# EAGLE board Stand Alone Wearable (EAGLE 5.11)
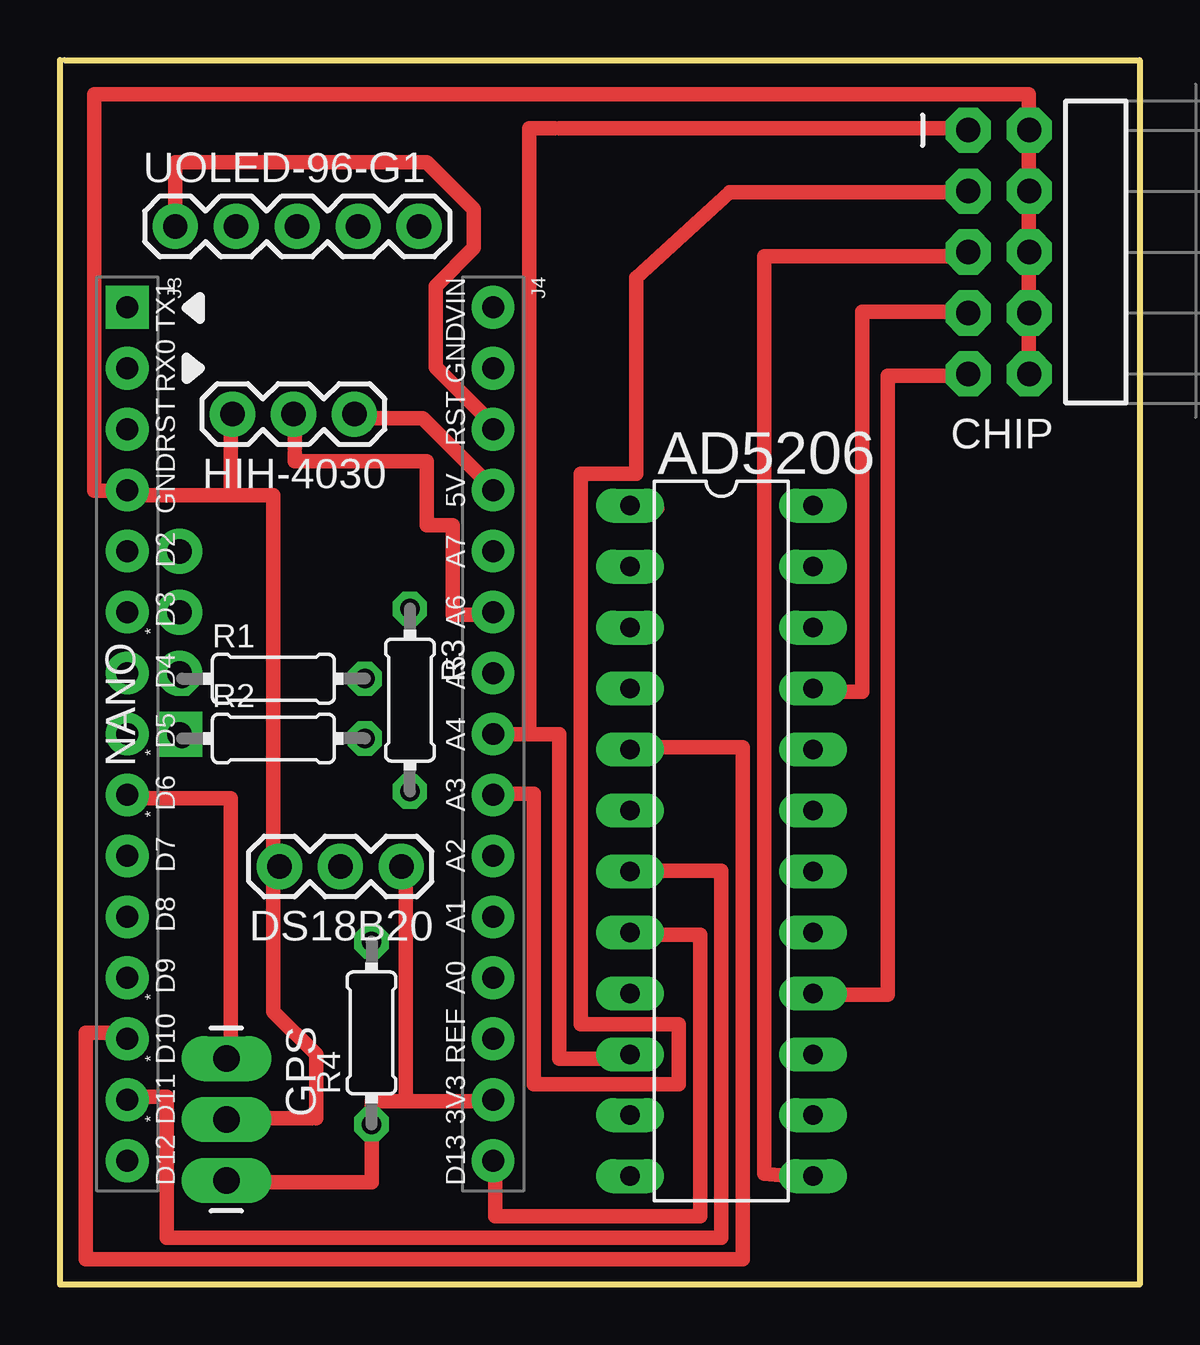
[diagram p0: board, top side]
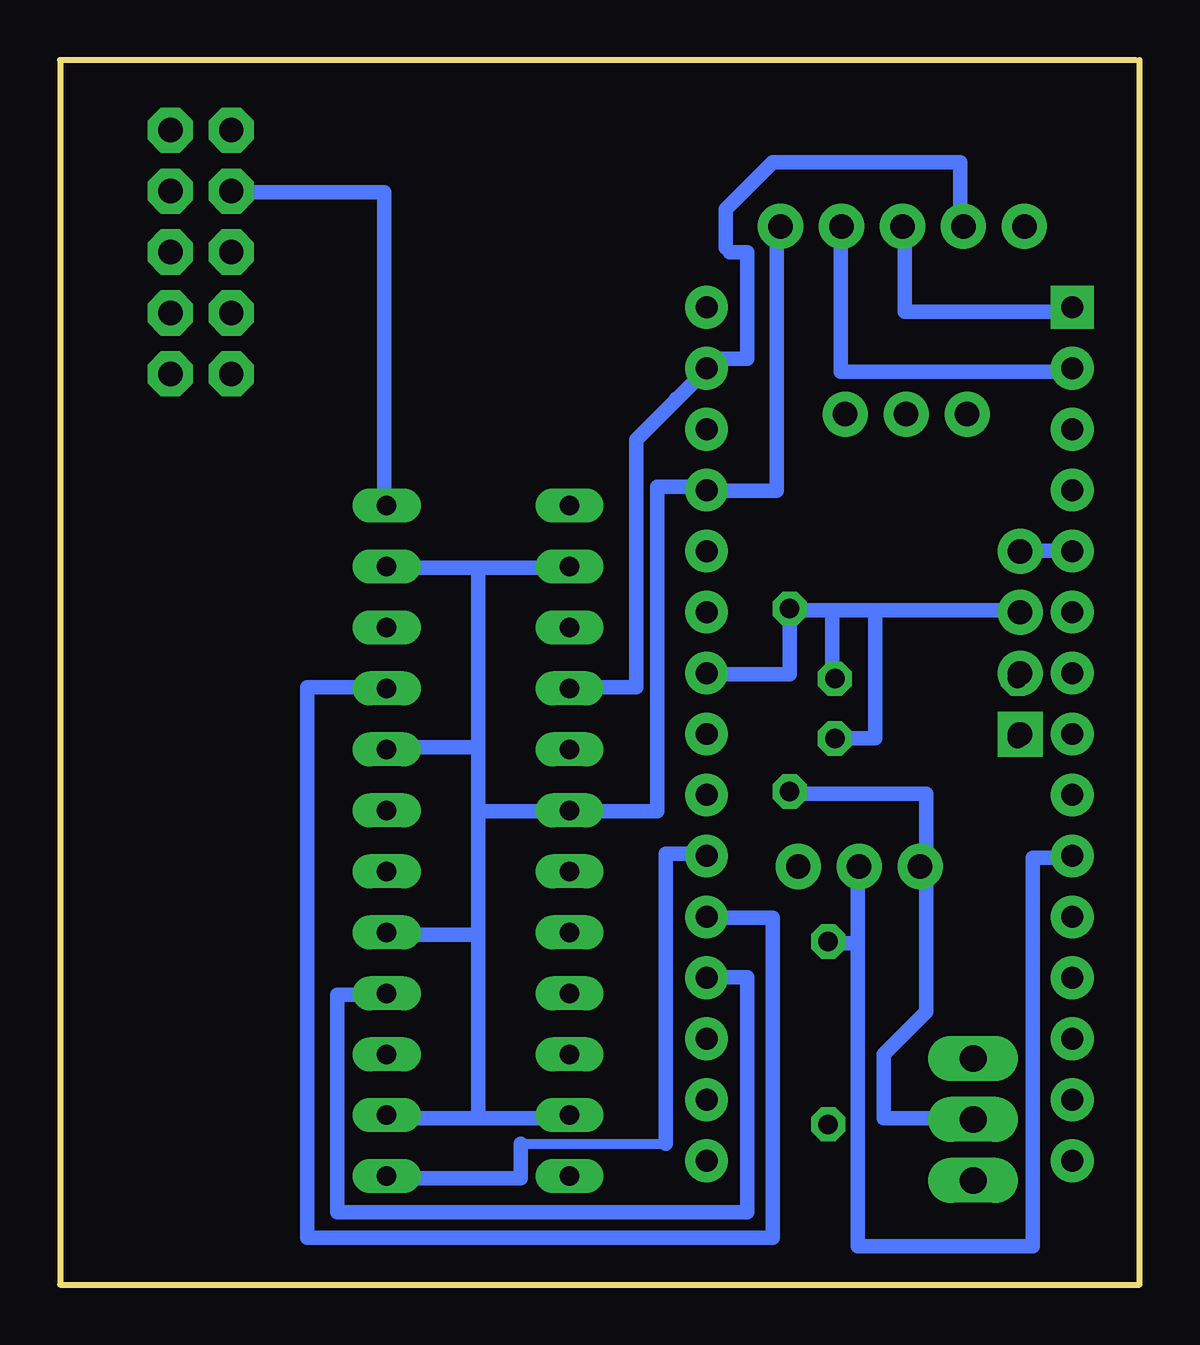
[diagram p1: board, bottom side, seen from below]

Size 44.98 x 51.03 mm. Coordinates in mm from the lower left corner, seen from the top.
Outline: 0.18,51.03 44.98,51.03 44.98,0 0,0 0,51.03
Copper layers (1*16): Top 0.035mm / dielectric 1.5mm / Bottom 0.035mm
Design rules "default *": minimum track width 8mil, minimum drill 16mil, track to track 8mil, track to pad 8mil, pad to pad 8mil, via to via 8mil, smd to smd 8mil, copper to edge 8mil, drill to drill 8mil, minimum pad ring 12mil, minimum via ring 8mil, stop-mask expansion 4mil, vias tented up to drill 18mil, thermal gap 10mil

## Footprints (pad centres in the part's own frame; a part is rotated, then mirrored left to right if it is on the bottom)
DIL24-3 = drill 0.813 long: 1 -13.97,-3.81; 2 -11.43,-3.81; 3 -8.89,-3.81; 4 -6.35,-3.81; 5 -3.81,-3.81; 6 -1.27,-3.81; 7 1.27,-3.81; 8 3.81,-3.81; 9 6.35,-3.81; 10 8.89,-3.81; 11 11.43,-3.81; 12 13.97,-3.81; 13 13.97,3.81; 14 11.43,3.81; 15 8.89,3.81; 16 6.35,3.81; 17 3.81,3.81; 18 1.27,3.81; 19 -1.27,3.81; 20 -3.81,3.81; 21 -6.35,3.81; 22 -8.89,3.81; 23 -11.43,3.81; 24 -13.97,3.81
2X5-RA = drill 1.016 pad 1.88 octagon: 1 -1.27,5.08; 2 1.27,5.08; 3 -1.27,2.54; 4 1.27,2.54; 5 -1.27,0; 6 1.27,0; 7 -1.27,-2.54; 8 1.27,-2.54; 9 -1.27,-5.08; 10 1.27,-5.08
1X03 = drill 1.016 pad 1.88 round: 1 0,0; 2 2.54,0; 3 5.08,0
1X03_LONGPADS = drill 1.118 pad 1.88 long: 1 0,0; 2 2.54,0; 3 5.08,0
HEAD15-NOSS = drill 0.914 pad 1.778 square: 1 0,0 | drill 0.914 pad 1.778 round: 2 2.54,0; 3 5.08,0; 4 7.62,0; 5 10.16,0; 6 12.7,0; 7 15.24,0; 8 17.78,0; 9 20.32,0; 10 22.86,0; 11 25.4,0; 12 27.94,0; 13 30.48,0; 14 33.02,0; 15 35.56,0
HEAD15-NOSS-1 = drill 0.914 pad 1.778 round: 1 0,0; 2 2.54,0; 3 5.08,0; 4 7.62,0; 5 10.16,0; 6 12.7,0; 7 15.24,0; 8 17.78,0; 9 20.32,0; 10 22.86,0; 11 25.4,0; 12 27.94,0; 13 30.48,0; 14 33.02,0; 15 35.56,0
1X04_NO_SILK = drill 1.016 pad 1.88 square: 1 0,0 | drill 1.016 pad 1.88 round: 2 2.54,0; 3 5.08,0; 4 7.62,0
0204/7 = drill 0.813 octagon: 1 -3.81,0; 2 3.81,0
1X05 = drill 1.016 pad 1.88 round: 1 0,0; 2 2.54,0; 3 5.08,0; 4 7.62,0; 5 10.16,0

## Placement (x,y rotation side)
AD5206  [DIL24-3]  27.56,18.49 270 top
CHIP  [2X5-RA]  39.12,43.03 0 top
DS18B20  [1X03]  14.22,17.42 180 top
GPS  [1X03_LONGPADS]  6.93,9.42 270 top
HIH-4030  [1X03]  12.27,36.27 180 top
J3  HEAD15-NOSS  [HEAD15-NOSS]  2.8,40.73 270 top
J4  HEAD15-NOSS-1  [HEAD15-NOSS-1]  18.04,40.73 270 top
NANO  [1X04_NO_SILK]  4.98,22.94 90 top
R1  27k  [0204/7]  8.89,25.25 0 top
R2  20k  [0204/7]  8.89,22.76 0 top
R3  20k  [0204/7]  14.58,24.36 270 top
R4  4.7k  [0204/7]  12.98,10.49 90 top
UOLED-96-G1  [1X05]  4.8,44.09 0 top

## Library data of the parts
AD5206 = analog-devices
CHIP DS18B20 GPS HIH-4030 NANO UOLED-96-G1 = SparkFun
J3 J4 = MyCON2
R1-R4 = rcl

## Nets
S$22: UOLED-96-G1.1

## Tracks (layer width: path | path; a pad name or v marks a point on that pad's centre or on a via)
S$1
  Bottom 0.61: 27.56,29.87 31.47,29.87 | 27.56,29.87 23.83,29.87 | 27.56,22.4 31.47,22.4 | 27.56,22.4 27.56,29.87 | 27.56,14.58 31.29,14.58 | 27.56,14.58 27.56,22.4 | 27.56,6.93 31.47,6.93 | 27.56,6.93 27.56,14.58 | 23.83,6.93 27.56,6.93
S$2
  Top 0.61: 37.87,45.52 27.91,45.52 24,41.96 24,33.78 21.69,33.78 21.69,10.85 25.78,10.85 25.78,8.36 19.74,8.36 19.74,20.45 18.14,20.45
S$3
  Bottom 0.61: 27.38,19.74 20.09,19.74 20.09,33.25 18.14,33.25 18.14,33.07 15.11,33.07 15.11,44.27
S$4
  Top 0.61: 23.83,22.4 28.45,22.4 28.45,1.07 1.07,1.07 1.07,10.49 2.85,10.49 2.85,10.31
S$5
  Top 0.61: 23.83,17.25 27.56,17.25 27.56,1.96 4.45,1.96 4.45,7.82 2.85,7.82 2.85,7.65
S$6
  Top 0.61: 23.83,14.58 26.67,14.58 26.67,2.84 18.14,2.84 18.14,5.16
S$7
  Top 0.61: 31.29,12.09 34.49,12.09 34.49,37.87 37.87,37.87
S$8
  Top 0.61: 31.47,24.71 33.43,24.71 33.43,40.54 37.87,40.54 37.87,40.36
S$9
  Top 0.61: 31.29,4.45 29.34,4.62 29.34,42.85 37.87,42.85 37.87,43.03
S$10
  Bottom 0.61: 31.47,32.54 31.47,45.52 37.87,45.52
S$11
  Top 0.61: 19.56,22.94 20.8,22.94 20.8,9.42 23.83,9.42 | 19.56,22.94 18.14,22.94 | 20.63,48.18 19.56,48.18 19.56,22.94
S$12
  Bottom 0.61: 11.74,17.42 11.74,1.6 4.45,1.6 4.45,4.8 4.45,5.16 4.45,17.78 2.67,17.78
S$13
  Bottom 0.61: 31.29,12.09 33.43,12.09 33.43,3.02 16.36,3.02 16.36,12.8 18.14,12.8
S$14
  Bottom 0.61: 31.29,24.89 34.67,24.89 34.67,1.96 15.29,1.96 15.29,15.29 18.14,15.29 18.14,15.47
S$15
  Bottom 0.406: 25.78,5.87 19.74,5.87
  Bottom 0.61: 31.29,4.45 25.78,4.45 25.78,5.87 | 19.74,5.87 19.74,17.96 17.96,17.96 17.96,17.78
S$16
  Top 0.61: 12.45,36.09 15.11,36.09 18.14,33.07
S$17
  Top 0.61: 7.11,32.89 7.11,36.09 | 2.85,32.89 7.11,32.89 | 7.11,32.89 8.89,32.89 8.89,11.38 10.67,9.6 10.67,6.93
S$18
  Top 0.61: 7.11,9.07 7.11,20.27 2.85,20.27
S$19
  Top 0.61: 14.4,7.65 12.98,7.65 12.98,4.27 6.93,4.27 | 14.4,7.65 18.14,7.65 | 14.4,17.42 14.4,7.65
S$20
  Bottom 0.61: 12.45,44.09 12.45,38.05 2.85,38.05
S$21
  Bottom 0.61: 9.78,44.27 9.78,40.54 3.02,40.54
S$22
  Top 0.61: UOLED-96-G1.1 4.8,46.76 15.29,46.76 17.25,44.81 17.25,43.21 15.65,41.61 15.65,38.23 18.14,35.74
S$23
  Bottom 0.61: 5.16,30.58 2.67,30.58
S$24
  Bottom 0.61: 6.93,6.93 10.49,6.93
S$25
  Top 0.61: 40.36,37.87 40.36,49.61 1.42,49.61 1.42,33.07 2.85,33.07
S$26
  Top 0.61: 9.78,34.85 9.78,36.27
S$27
  Top 0.61: 20.8,48.18 38.05,48.18
S$28
  Bottom 0.61: 18.14,38.23 18.14,38.05 20.98,35.2 20.98,24.89 23.83,24.89
S$29
  Top 0.61: 9.78,34.67 9.78,34.32 15.29,34.32 15.29,31.65 16.36,31.65 16.36,27.91 18.14,27.91 18.14,28.09
S$30
  Bottom 0.61: 5.16,28.09 12.8,28.09 | 18.14,25.43 14.58,25.43 14.58,28.09 12.8,28.09 | 12.8,25.07 12.8,28.09
S$31
  Bottom 0.61: 12.62,22.76 11.02,22.76 11.02,27.91
S$32
  Bottom 0.61: 14.58,20.45 8.89,20.45 8.89,11.38 10.67,9.6 10.67,6.93
S$33
  Bottom 0.61: 17.25,43.21 17.25,44.81 15.29,46.76 7.47,46.76 7.47,43.74
S$34
  Bottom 0.61: 17.07,43.03 16.36,43.03 16.36,38.58 17.78,38.58 17.78,38.23
S$35
  Bottom 0.406: 19.38,36.98 19.38,36.8
S$36
  Top 0.61: 23.83,32.36 24.89,32.36
S$37
  Top 0.61: 6.93,6.93 10.49,6.93
S$38
  Bottom 0.61: 13.16,14.22 11.91,14.22

## Text on the board
tPlace: VIN | TX1 | RX0 | GND | RST | RST | GND | 5V | D2 | A7 | * | D3 | A6 | D4 | A5 | D5 | A4 | * | * | D6 | A3 | D7 | A2 | D8 | A1 | D9 | A0 | * | * | D10 | REF | * | D11 | 3V3 | D12 | D13